# Altium PCB Optosense.PcbDoc
Units mm, origin at the board's own origin, x right, y up, seen from the top; angles counter-clockwise.
Board outline 49.97 x 13 mm, 2 copper layers (Top Layer, Bottom Layer); 44 components, 28 nets, 109 pads, 18 vias.
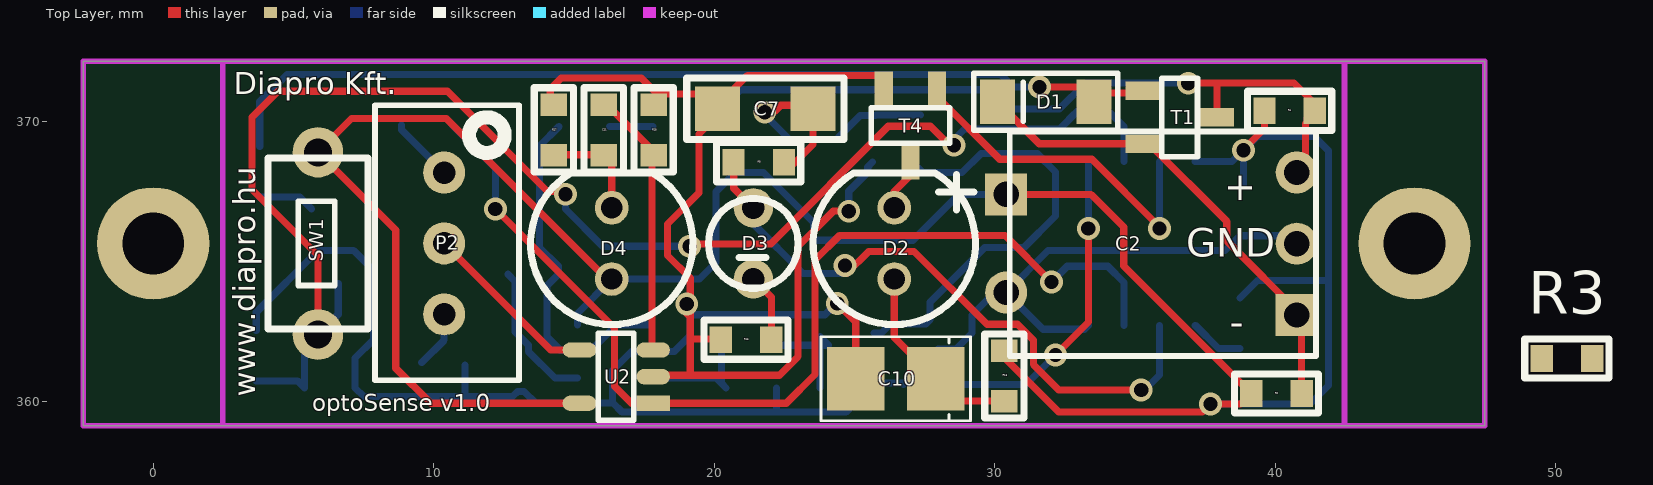
[diagram p0: Top Layer view]
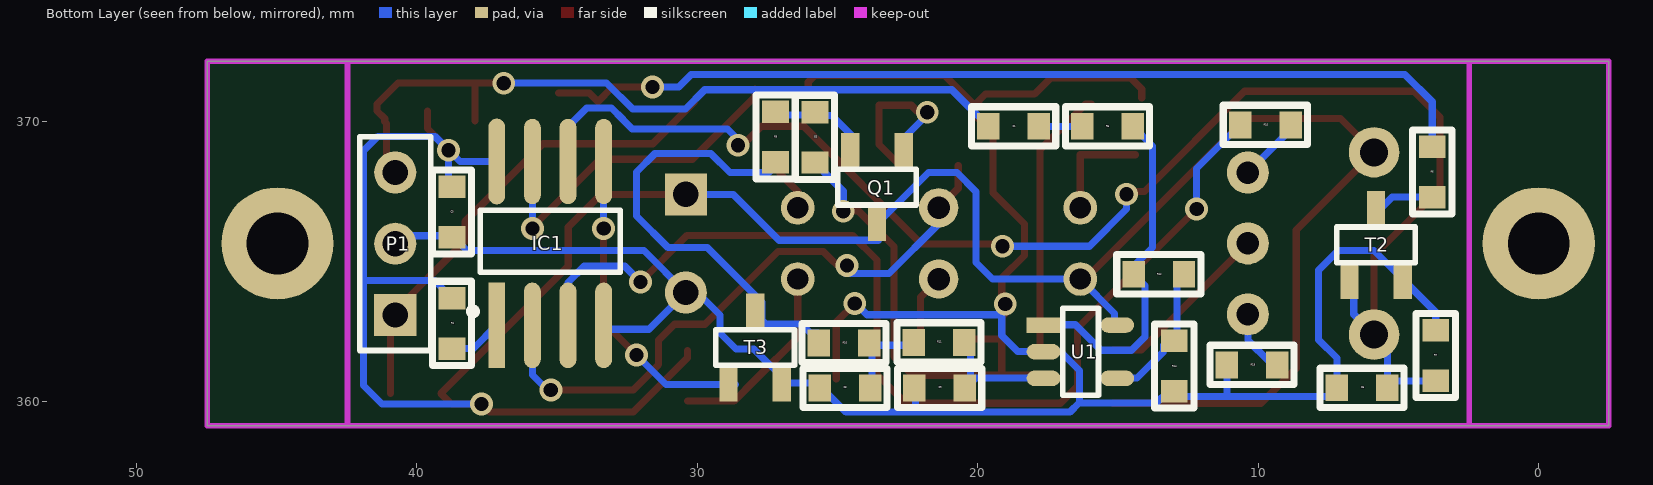
[diagram p1: Bottom Layer view, seen from below]
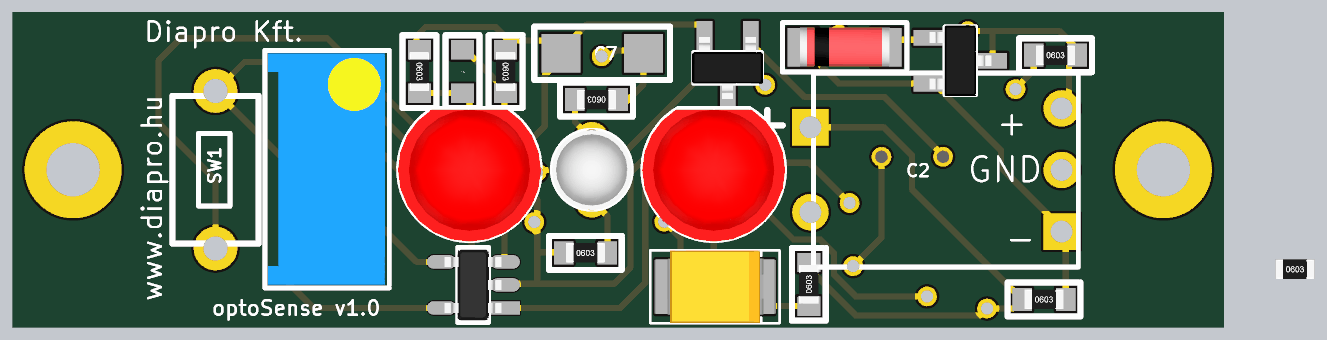
[diagram p2: 3D render of the assembled board from above, using the file's embedded part models]
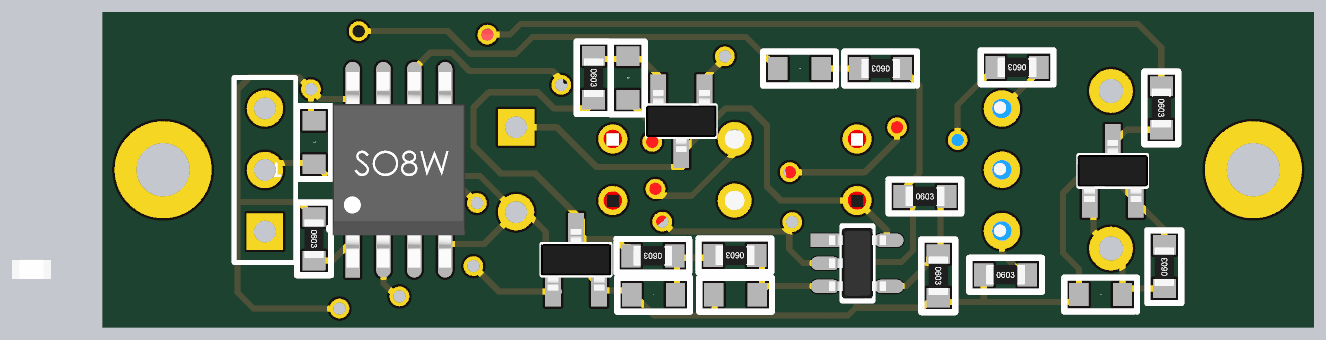
[diagram p3: 3D render of the assembled board from below, using the file's embedded part models]

## Layer stack, top to bottom
Top Layer: signal copper 0.0356
Dielectric: dielectric 0.32, FR-4, Dk 4.8
Bottom Layer: signal copper 0.0356

## Board outline
-2.5,359.148 -2.5,372.148 47.474,372.148 47.474,359.148

## Design rules (kind name [scope] priority, off if disabled: settings)
Clearance [All] p1: gap=0.254
PolygonConnect [All] p1: connectstyle=Relief reliefconductorwidth=0.254 reliefentries=4 polygonreliefangle="90 Angle"
RoutingVias [All] p1: holewidth=0.711 width=1.27 viastyle="Through Hole" minholewidth=0.508 minwidth=0.813 maxholewidth=0.508 maxwidth=0.813
SilkToSilkClearance [All] p1: silktosilkclearance=0
SilkscreenOverComponentPads [All] p1: minsilkscreentomaskgap=0
SolderMaskExpansion [All] p1: expansion=0.102
Width [All] p1: maxlimit=0.254 minlimit=0.254 preferedwidth=0.254
26 further rules are at their usual default settings.

## Components (designator, comment, footprint, x,y, rotation, side; value= is the part's Value field where it differs from the comment)
C1 "150pF" FP_0603_CAP_080 18.724,369.823 r0 bottom
C2 "1000uF" CAP_8x11_fekvo 30.414,365.648 r0 top
C3 "100nF" FP_0603_CAP_080 38.749,366.772 r90 bottom
C5 "100nF" FP_0603_CAP_080 6.299,360.498 r180 bottom
C6 "100nF" FP_0603_CAP_080 25.806,369.433 r90 bottom
C7 "22uF" FP_1206_CAP_125 21.824,370.452 r0 top
C8 "150pF" FP_0603_CAP_080 24.74,360.492 r180 bottom
C9 "150pF" FP_0603_CAP_080 21.361,360.492 r180 bottom
C10 "100uF" FP_3528 26.474,360.823 r180 top
C11 "150pF" FP_0603_CAP_080 16.063,369.697 r90 top
D1 "ZENER_8.2V" SOD-80 31.824,370.698 r90 top
D2 "IR ado" LED_IR_5mm 26.424,365.648 r90 top
D3 "LED_RED" "led_3mm_standing R" 21.397,365.648 r90 top
D4 "IR vevo" LED_IR_5mm 16.349,365.648 r90 top
IC1 "ATtiny13" WSON_n_SOIC8 35.249,365.648 r90 bottom
P1 "Header 3" HDR1X3 40.774,363.098 r90 bottom
P2 "POTI" RES_trimmer_helipot_mini_90 10.374,365.648 r0 top
Q1 "NPN BC847A" TR_SOT23 23.597,367.655 r90 bottom
R1 "10K" FP_0603_RES 38.749,362.798 r270 bottom
R2 "1K5" FP_0603_RES 40.049,360.298 r0 top
R3 "100K" FP_0603_RES 50.404,361.544 r0 top
R4 "1K5" FP_0603_RES 40.524,370.373 r0 top
R5 "10K" FP_0603_RES 15.374,369.823 r0 bottom
R6 "10K" FP_0603_RES 3.799,368.198 r270 bottom
R7 "10K" FP_0603_RES 3.674,361.648 r90 bottom
R8 "15K" FP_0603_RES 21.59,368.544 r180 top
R9 "10K" FP_0603_RES 27.214,369.443 r270 bottom
R10 "100K" FP_0603_RES 24.774,362.098 r0 bottom
R11 "100K" FP_0603_RES 21.387,362.117 r0 bottom
R12 "3K" FP_0603_RES 13.549,364.548 r180 bottom
R13 "120R" FP_0603_RES 30.349,360.923 r90 top
R14 "2.2K" FP_0603_RES 12.999,361.273 r270 bottom
R15 "100K" FP_0603_RES 9.749,369.873 r0 bottom
R16 "10K" FP_0603_RES 21.133,362.219 r0 top
R17 "470K" FP_0603_RES 14.285,369.697 r270 top
R18 "560K" FP_0603_RES 17.841,369.697 r270 top
R19 "0R" FP_0603_RES 10.221,361.315 r180 bottom
SW1 "SW_tactile_2pin" SW_TACT_2PIN 5.874,365.648 r90 top
T1 "BSS84" FET_SOT23 36.601,370.144 r180 top
T2 "MMBF170" FET_SOT23 5.801,365.599 r270 bottom
T3 "MMBF170" FET_SOT23 27.94,361.94 r270 bottom
T4 "SI2306" FET_SOT23 26.999,369.848 r90 top
U1 "MCP6001" ANALOG_SOT23-5 16.332,361.787 r180 bottom
U2 "MCP6001" ANALOG_SOT23-5 16.499,360.898 r180 top

## Footprints (in the part's own frame and the unit in brackets; to place one, negate y for a bottom-side part, rotate by r counter-clockwise, add the part's x,y. Pads: shape width x height; smd on the part's side, far side on the other; paste and mask are expansions set on the pad)
ANALOG_SOT23-5 [mm] "SOT23, 5-Leads, Body 2.9x1.6mm, Pitch 0.95mm, Lead Span 2.8mm, IPC Medium Density"
  rect 1.2x0.55 smd mask+0.05: 1(-1.327,0.95)
  oval 1.2x0.55 smd mask+0.05: 2(-1.327,0) 3(-1.327,-0.95) 4(1.3,-0.95) 5(1.3,0.95)
  silkscreen extent -0.64,-1.55 0.64,1.55, body extent -1.17,-1.46 1.17,1.46, height 1
CAP_8x11_fekvo [mm]
  round 1.5 hole 0.9: N(0,-1.75)
  rect 1.5x1.5 hole 0.9: P(0,1.75)
  silkscreen extent -2.41,-4.01 11.05,3.99, body extent -0.35,-4.01 11.09,3.96, height 7.99
FET_SOT23 [mm] "SOT23-3 tok"
  rect 1.2x0.65 smd: D(-1.327,0) G(1.327,-0.95) S(1.327,0.95)
  silkscreen extent -0.64,-1.4 0.64,1.4, body extent -1.27,-1.46 1.27,1.46, height 0.97
FP_0603_CAP_080 [mm] "0.8mm magas 0603 kapacitás"
  rect 0.8x0.95 smd: 1(-0.9,0) 2(0.9,0)
  silkscreen extent -1.5,-0.7 1.5,0.7, body extent -0.8,-0.4 0.76,0.4, height 0.8
FP_0603_RES [mm] "0603 ellenállás"
  rect 0.8x0.95 smd: 1(-0.9,0) 2(0.9,0)
  silkscreen extent -1.5,-0.7 1.5,0.7, body extent -0.8,-0.4 0.8,0.4, height 0.44
FP_1206_CAP_125 [mm] "1206 kapacitás 1.25 mm"
  rect 1.6x1.6 smd: 1(-1.7,0) 2(1.7,0)
  silkscreen extent -2.8,-1.1 2.8,1.1, body extent -1.52,-0.79 1.58,0.79, height 1.25
FP_3528 [mm] "3528 TANTÁL SMD \"B\"-TOK"
  rect 2.05x2.25 smd: N(1.425,0) P(-1.425,0)
  silkscreen extent -2.67,-1.5 2.67,1.5, body extent -2.52,-1.5 2.48,1.5, height 2.11
HDR1X3 [mm] "Connector; Header; 3 Position"
  rect 1.5x1.5 hole 0.9: 1(0,0)
  round 1.5 hole 0.9: 2(2.54,0) 3(5.08,0)
  silkscreen extent -1.27,-1.27 6.35,1.27
"led_3mm_standing R" [mm]
  round 1.4 hole 0.8: A(1.27,0) K(-1.27,0)
  silkscreen extent -1.6,-1.6 1.6,1.6, body extent -1.66,-1.65 1.64,1.64, height 5.51
LED_IR_5mm [mm]
  round 1.2 hole 0.762: A(-1.27,0) K(1.27,0)
  silkscreen extent -2.9,-2.89 2.51,2.89, body extent -3.02,-3.02 2.67,3.02, height 9.53
RES_trimmer_helipot_mini_90 [mm]
  round 1.5 hole 0.8: 1(0,2.527) 2(0,0) 3(0,-2.527)
  silkscreen extent -2.46,-4.88 2.67,4.93, body extent -2.33,-4.74 2.5,4.79, height 11.55
SOD-80 [mm]
  rect 1.6x1.25 smd: A(0,-1.725) K(0,1.725)
  silkscreen extent -1.02,-2.57 1.02,2.57, body extent -0.79,-1.85 0.81,1.85, height 1.61
SW_TACT_2PIN [mm]
  round 1.8 hole 1: 1(-3.25,0) 2(3.25,0)
  silkscreen extent -3.05,-1.78 3.05,1.78, body extent -3.75,-1.78 3.75,1.78, height 4.3
TR_SOT23 [mm] "SOT23-3 tok"
  rect 1.2x0.65 smd: B(1.327,-0.95) C(-1.327,0) E(1.327,0.95)
  silkscreen extent -0.64,-1.4 0.64,1.4, body extent -1.27,-1.46 1.27,1.46, height 0.97
WSON_n_SOIC8 [mil]
  rect 120x23.62 smd: 1(-115,75)
  oval 120x23.62 smd: 2(-115,25) 3(-115,-25) 4(-115,-75) 5(115,-75) 6(115,-25) 7(115,25)
  oval 120.42x23.62 smd: 8(115,75)
  silkscreen extent -100,-98 46,113, body extent -159,-107 159,107, height 86

## Part data
C1 C3 C5 C6 C8 C9 C11: library part CAP, "Capacitor"
C2 C10: library part CAP_ELECT, "Polarized Capacitor"
C7: library part Cap, "Capacitor"
D1: library part ZENER, "Zener Diode"
D2 D4: library part LED_B, "Typical LED"
D3: library part LED_R, "Typical LED"
P1: "Header, 3-Pin"
Q1: library part NPN
R1 R2 R3 R4 R5 R6 R7 R8 R9 R10 R11 R12 R13 R14 R15 R16 R17 R18 R19: library part RES, "Resistor"
T1: library part PMOS
T2 T3 T4: library part NMOS

## Free pads (board coordinates)
  round 4 hole 2.2: 0(0,365.648) 0(44.974,365.648)

## Via types
v1: diameter 0.813, hole 0.508, Top Layer to Bottom Layer, 18 vias

## Nets (pads, with @x,y where several pads share a name; then routed paths per layer and width w, separated by ;. In a path a pad name is that pad's centre, name@x,y a point inside that pad or via, vN(x,y) a via of type N, cw(c..) or ccw(c..) an arc to the next point about the centre after c; other vN are vias at no path point)
2V4: C2.P C3.2 D4.A IC1.8 Q1.C R1.1 R2.1 R4.1 R13.2 SW1.2 U1.5 U2.5 | length 97.7
  Top Layer w0.254: U2.5 9.899,359.948 8.649,361.198 8.649,366.123 SW1.2 7.074,370.098 10.451,370.098 16.171,364.378 D4.A ; R13.2 30.349,361.573 32.286,359.636 37.413,359.636 v1(37.701,359.923) 38.774,359.923 R2.1 34.605,364.842 34.605,366.237 33.444,367.398 C2.P ; v1(38.874,368.973) 38.874,368.998 39.624,369.748 R4.1
  Bottom Layer w0.254: U1.5@15.124,362.748 15.124,363.153 D4.A 19.482,364.378 20.066,364.962 20.066,367.49 20.749,368.173 21.763,368.173 23.547,366.389 23.547,365.76 27.086,365.76 28.724,367.398 C2.P ; IC1.8 38.47,368.569 v1(38.874,368.973) ; v1(37.701,359.923) 37.699,359.921 41.247,359.921 41.905,360.579 41.905,364.323 ; R1.1 39.374,364.323 41.905,364.323 ; C3.2@38.874,367.723 v1(38.874,368.973) ; v1(38.874,368.973) 39.368,369.467 41.393,369.467 41.905,368.955 41.905,364.323
19KHZ: IC1.5 T3.G | length 11.5
  Top Layer w0.254: v1(32.175,361.673) 33.344,362.842 v1@33.344,366.385
  Bottom Layer w0.254: T3.G@28.649,360.621 31.123,360.621 v1(32.175,361.673) ; v1@33.344,366.218 IC1.5
  other v1: 33.344,366.181
GND: C2.N C3.1 C5.1 C6.1 C7.1 C8.1 C9.1 C10.N IC1.4 P1.2 R7.2 R14.2 R16.1 R17.1 R18.1 R19.1 T2.S T3.S T4.S U1.2 U2.2 | length 107.1
  Top Layer w0.254: R17.1@14.158,370.84 14.158,371.157 14.542,371.541 17.406,371.541 17.974,370.973 19.724,370.973 20.124,370.573 21.184,371.633 25.816,371.633 26.049,371.4 T4.S@26.049,371.15 ; U2.2 17.876,360.948 19.149,360.948 ; v1(19.025,363.489) 19.025,363.147 19.149,363.023 ; C7.1@20.124,370.223 19.456,369.555 19.456,367.455 18.337,366.335 18.337,365.222 19.149,364.409 19.149,363.023 ; R16.1@20.474,362.244 19.177,362.244 19.149,362.272 19.149,363.023 ; v1(24.386,363.506) 25.049,362.844 C10.N ; v1(24.799,366.798) 24.249,366.798 22.987,365.536 22.987,361.609 22.326,360.948 19.149,360.948 ; 19.149,360.948 19.149,363.023
  Bottom Layer w0.254: R7.2 3.674,363.196 5.874,365.396 7.147,365.396 7.849,364.694 7.849,362.212 7.199,361.563 C5.1 7.51,360.187 12.813,360.187 R14.2 13.225,360.373 13.64,359.958 16.374,359.958 16.374,359.981 ; R19.1 11.121,360.242 11.151,360.212 ; C9.1@22.224,360.498 22.224,359.705 22.299,359.631 ; v1(24.386,363.506) 24.357,363.506 23.957,363.106 19.232,363.106 19.149,363.023 19.149,362.369 18.578,361.798 17.054,361.798 16.374,361.118 16.374,359.981 ; v1(24.799,366.798) 24.799,367.511 25.476,368.188 25.476,368.375 C6.1@25.649,368.548 ; T3.S@26.749,360.621 T3.S@26.799,360.671 ; IC1.4 33.205,362.588 31.724,362.588 C2.N ; P1.2 40.489,365.923 38.749,365.923 38.22,365.394 31.91,365.394 C2.N ; 16.374,359.981 16.724,359.631 22.299,359.631 ; 22.299,359.631 24.707,359.631 25.747,360.671 26.773,360.671 27.991,361.889 28.626,361.889 29.193,362.456 29.193,363.091 30,363.898 C2.N
IR: IC1.7 T4.G | length 12.7
  Top Layer w0.254: T4.G@27.949,371.15 27.949,370.884 30.185,368.648 33.468,368.648 v1@35.884,366.232
  Bottom Layer w0.254: v1@35.884,365.963 IC1.7
  other v1: 35.884,366.181
LED: D3.A IC1.2 R8.2 | length 23.1
  Top Layer w0.254: R8.2@20.699,368.423 20.699,367.616 D3.A ; v1(24.663,364.861) 24.663,364.634 24.724,364.573 25.51,365.359 27.132,365.359 29.724,362.767 30.819,362.767 31.388,362.198 31.388,361.324 32.289,360.423 v1(35.226,360.423)
  Bottom Layer w0.254: D3.A 21.397,366.35 23.174,364.573 24.724,364.573 24.663,364.634 v1(24.663,364.861) ; v1(35.226,360.423) 35.349,360.423 35.884,360.958 IC1.2
LINE_A: D1.K P1.1 R2.2 T1.S | length 17.2
  Top Layer w0.254: D1.K 31.593,369.204 35.509,369.204 38.278,366.435 38.278,365.744 40.949,363.073 R2.2
LINE_B: C1.2 P1.3 R4.2 T1.D | length 27.6
  Top Layer w0.254: v1(36.906,371.363) 36.917,371.374 40.675,371.374 41.424,370.625 R4.2 41.148,370.097 41.148,369.991 41.082,369.925 41.082,368.486 P1.3 ; 37.861,371.374 37.928,371.306 T1.D T1.D@37.928,370.017
  Bottom Layer w0.254: C1.2 20.93,371.129 29.737,371.129 30.43,370.436 32.305,370.436 33.243,371.374 37.076,371.374 v1@37.076,371.421
MUTE: C5.2 IC1.6 R7.1 SW1.1 T2.G | length 53.2
  Top Layer w0.254: SW1.1 5.874,365.223 3.524,367.573 3.524,370.148 4.449,371.073 10.487,371.073 14.062,367.498 14.699,367.498 v1(14.699,367.398) ; v1(19.124,365.548) 19.209,365.633 22.019,365.633 26.21,369.824 27.71,369.824 28.28,369.254 28.468,369.254 28.634,369.089 28.634,369.082 v1@28.6,369.048
  Bottom Layer w0.254: R7.1 5.149,360.748 C5.2 5.399,361.923 SW1.1 6.599,363.123 T2.G@6.599,364.221 ; v1(14.699,367.398) 14.699,366.87 16.021,365.548 v1(19.124,365.548) ; v1@28.516,369.315 28.924,369.723 32.324,369.723 32.663,370.062 32.663,370.075 33.062,370.474 33.948,370.474 34.614,369.808 IC1.6
  other v1: 28.549,369.15
NetC1_1: C1.1 R5.2 | length 1.5
  Bottom Layer w0.254: R5.2 C1.1
NetC6_2: C6.2 Q1.E R9.1 | length 3.2
  Bottom Layer w0.254: Q1.E@24.445,369.443 25.207,370.205 25.754,370.205 25.772,370.223 R9.1@27.349,370.223
NetC7_2: C7.2 Q1.B R8.1 | length 6.1
  Top Layer w0.254: v1@21.7,370.248 21.799,370.248 21.924,370.123 22.374,370.573 23.524,370.573 23.524,369.173 22.774,368.423 R8.1@22.499,368.423
  Bottom Layer w0.254: v1@21.7,370.248 21.799,370.248 Q1.B@22.672,369.375
  other v1: 21.802,370.324
NetC8_2: C8.2 R10.1 R11.2 | length 4.1
  Bottom Layer w0.254: R11.2 22.388,362.016 24.081,362.016 23.774,362.323 C8.2@23.774,360.498
NetC9_2: C9.2 R11.1 U1.3 | length 4.6
  Bottom Layer w0.254: U1.3@17.751,360.848 20.074,360.848 20.424,360.498 20.269,360.653 20.269,361.9 R11.1
NetC10_P: C10.P D2.A R13.1 | length 6.9
  Top Layer w0.254: D2.A 26.424,362.298 C10.P 28.699,360.023 R13.1
NetC11_1: C11.1 D4.K R17.2 | length 3.8
  Top Layer w0.254: R17.2@14.389,368.808 16.349,368.808 D4.K
NetC11_2: C11.2 R18.2 U2.3 | length 9.7
  Top Layer w0.254: C11.2@15.949,370.623 16.153,370.623 17.789,368.987 17.789,361.885 U2.3
NetD1_A: D1.A R6.1 T1.G | length 33.7
  Top Layer w0.254: v1(31.599,371.223) 33.024,371.223 D1.A 33.858,371.007 T1.G@34.95,371.007
  Bottom Layer w0.254: R6.1 3.799,370.698 4.766,371.665 30.224,371.665 30.666,371.223 v1(31.599,371.223)
NetD2_K: D2.K T4.D | length 1.6
  Top Layer w0.254: D2.K 26.424,367.502 27.049,368.127 T4.D@27.049,368.273
NetD3_K: D3.K R16.2 | length 2.2
  Top Layer w0.254: D3.K 22.047,363.728 R16.2@22.047,362.422
NetIC1_1: IC1.1 R1.2 | length 1.9
  Bottom Layer w0.254: IC1.1 37.983,361.898 R1.2
NetP2_1: P2.1 R15.1 | length 2.3
  Bottom Layer w0.254: R15.1 8.849,369.7 P2.1
NetP2_2: P2.2 U2.4 | length 6.4
  Top Layer w0.254: P2.2 14.174,361.848 U2.4
NetP2_3: P2.3 R19.2 | length 2.1
  Bottom Layer w0.254: R19.2@9.574,361.398 10.374,362.198 P2.3
NetR6_2: R6.2 T2.D | length 2
  Bottom Layer w0.254: R6.2 5.226,367.298 T2.D@5.649,366.875
NetR9_2: R9.2 R10.2 T3.D | length 15.8
  Bottom Layer w0.254: R10.2@25.709,362.458 25.969,362.458 26.289,362.778 27.559,362.778 27.699,362.918 27.699,363.275 27.699,363.553 29.642,365.496 31.039,365.496 32.174,366.631 32.174,368.198 31.524,368.848 29.513,368.848 28.838,368.173 27.449,368.173 R9.2@27.199,368.423
NetR12_2: R12.2 R14.1 U1.4 | length 5.2
  Bottom Layer w0.254: R12.2 12.903,364.294 12.903,362.498 13.374,362.028 13.374,361.799 14.325,360.848 U1.4@15.124,360.848
SENSE: IC1.3 R15.2 U2.1 | length 38
  Top Layer w0.254: v1(12.199,366.873) 16.444,362.628 16.444,360.553 17.049,359.948 U2.1 22.574,359.948 23.599,360.973 23.599,365.059 24.477,365.937 30.369,365.937 v1(32.029,364.276) v1@32.029,364.124
  Bottom Layer w0.254: R15.2 12.199,368.323 v1(12.199,366.873) ; v1@32.029,364.124 v1(32.029,364.276) 32.588,364.835 34.037,364.835 34.614,364.258 IC1.3
SINE: R5.1 R12.1 U1.1 | length 12.5
  Bottom Layer w0.254: R5.1 13.777,369.126 13.777,365.506 14.449,364.834 R12.1 14.046,364.145 14.046,362.316 14.524,361.838 15.614,361.838 16.524,362.748 U1.1@17.751,362.748
pads on no net: R3.1 R3.2

## Keep-outs
Keep-Out Layer:
  lines w0.203: 2.474,359.148 -2.5,359.148 -2.5,372.148 2.474,372.148 ; 2.474,359.148 42.474,359.148 ; 2.474,359.148 2.474,372.148 ; 2.474,372.148 42.474,372.148 ; 42.474,359.148 47.474,359.148 47.474,372.148 42.474,372.148 ; 42.474,359.148 42.474,372.148

## Silkscreen, mask and mechanical layers (free items; w line width, h text height)
Top Overlay:
  text "Diapro Kft." at 2.87,370.967 h0.8
  text "+" at 38.329,368.198 h1.02 r270
  text "GND" at 36.83,365.176 h1.02
  text "-" at 38.379,362.356 h1.02
  text "www.diapro.hu" at 3.632,360.172 h0.8 r90
  text "optoSense v1.0" at 5.664,359.664 h0.6